# EAGLE board module_pcb v110 (EAGLE 9.7.0)
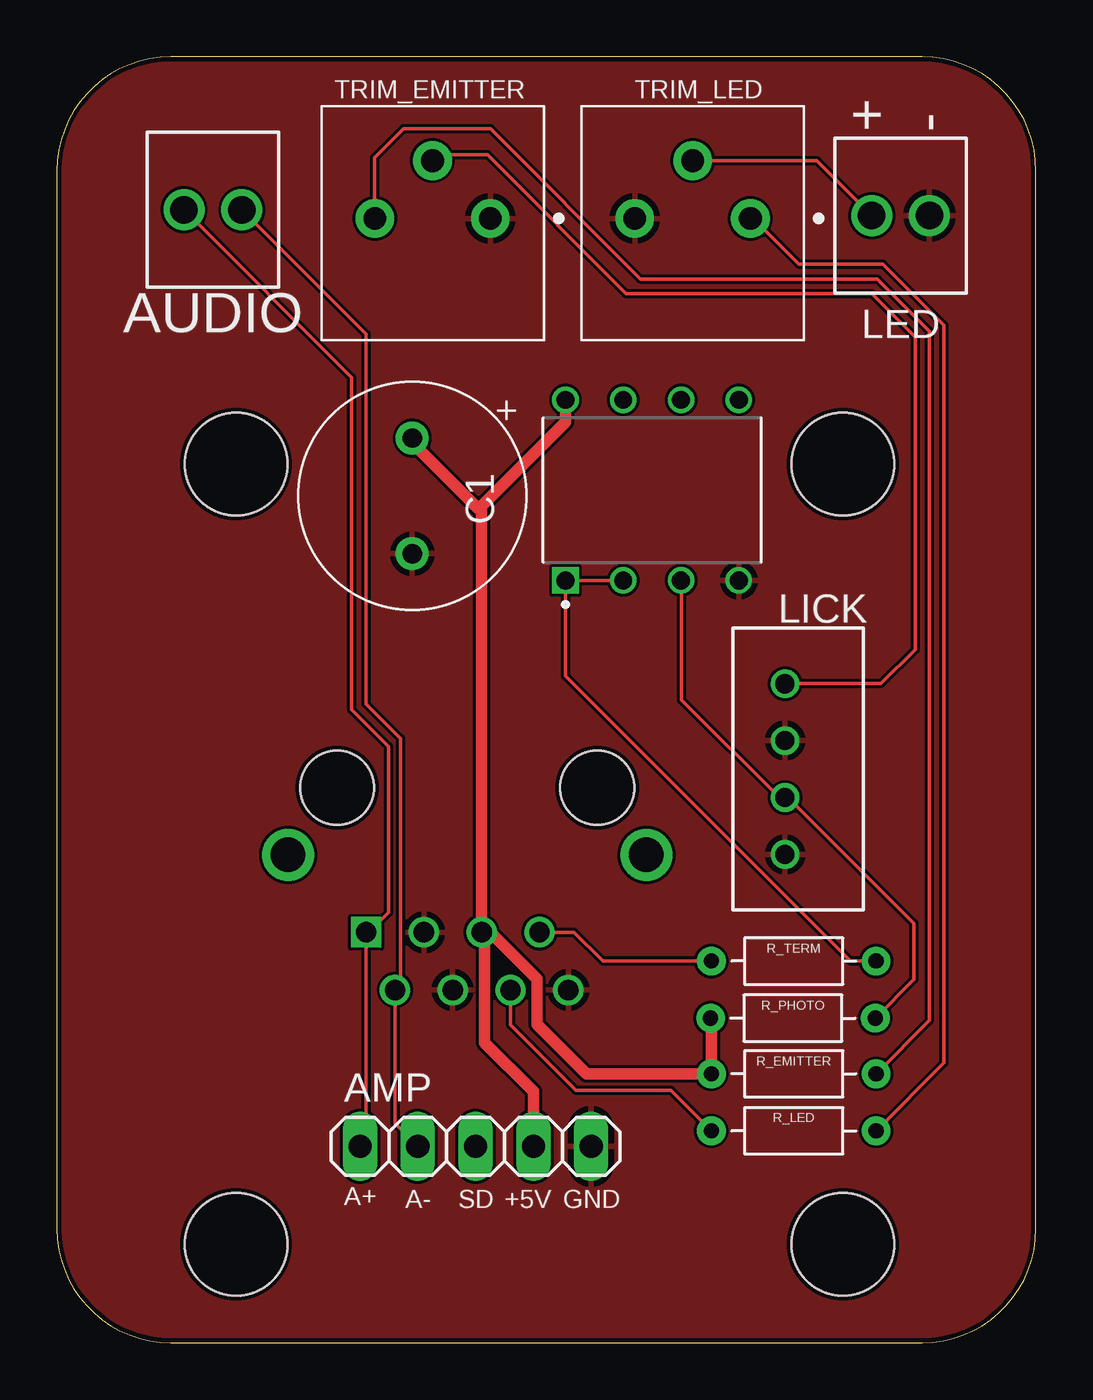
[diagram p0: board, top side]
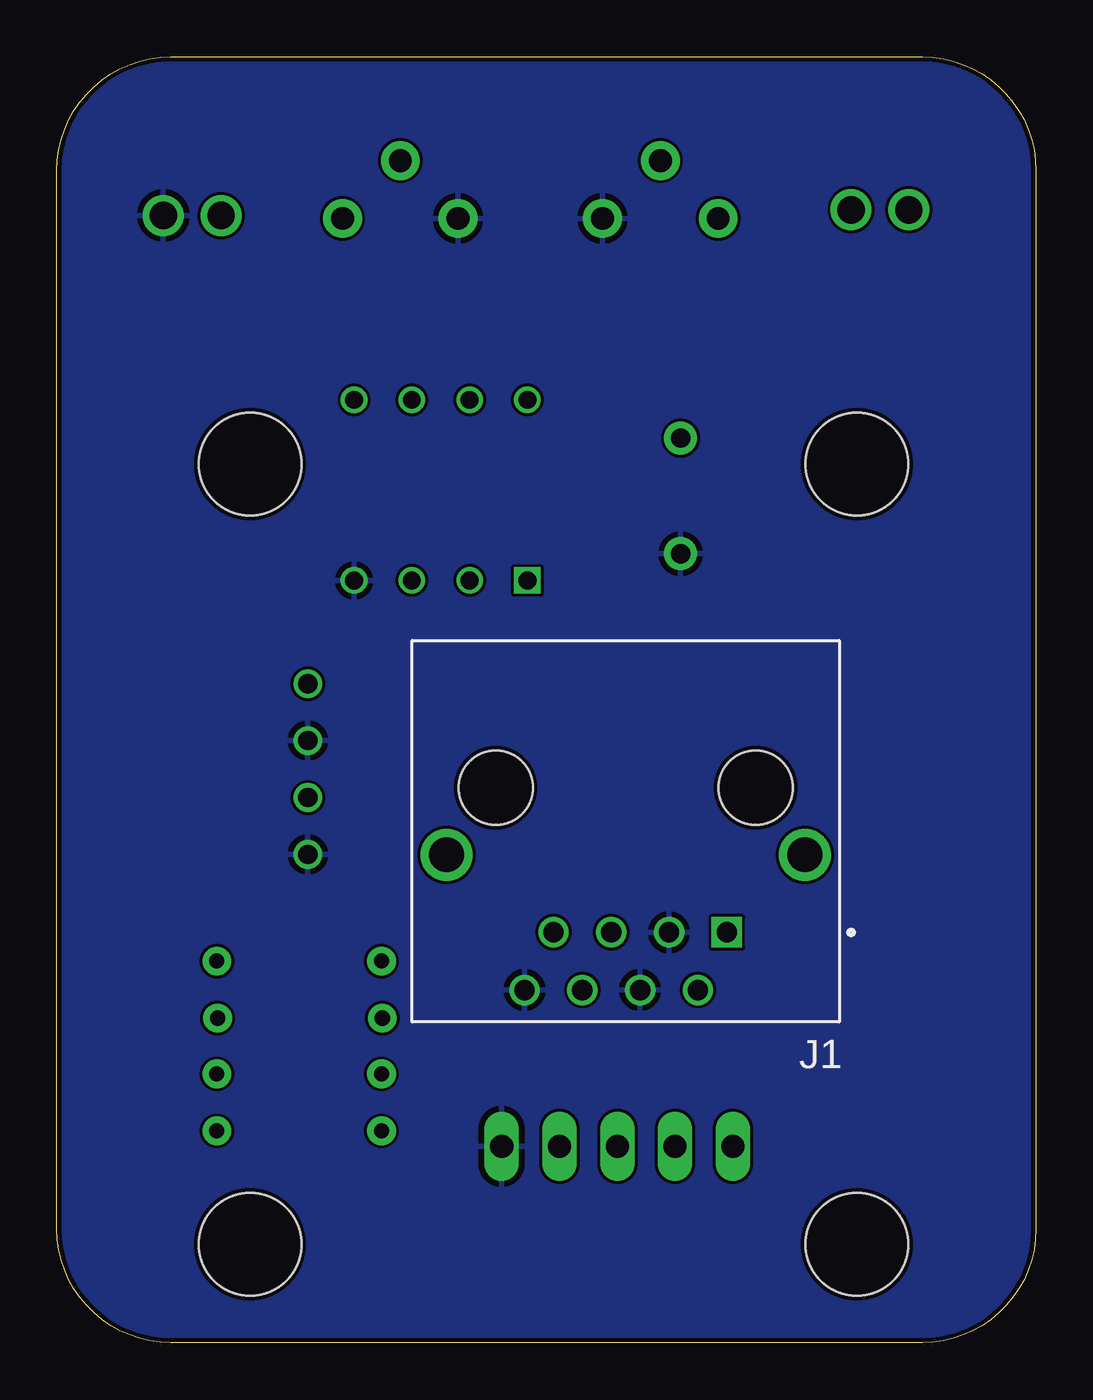
[diagram p1: board, bottom side, seen from below]

Size 43.03 x 56.5 mm. Coordinates in mm from the lower left corner, seen from the top.
Outline: 38.03,56.5 5,56.5 arc90 0,51.5 0,5 arc90 5,0 38.03,0 arc90 43.03,5 43.03,51.5 arc90 38.03,56.5
Copper layers (1*16): Top 0.035559375mm / dielectric 1.6mm / Bottom 0.035559375mm
Design rules "jlcpcb2layer": minimum track width 5mil, minimum drill 12mil, track to track 5mil, track to pad 5mil, pad to pad 5mil, via to via 5mil, smd to smd 5mil, copper to edge 8mil, drill to drill 6mil, minimum pad ring 5mil, minimum via ring 3mil, stop-mask expansion 2.5mil, vias tented up to drill 0mil, thermal gap 10mil
Holes 4.5 mm at 7.87,38.61 7.87,4.32 34.54,4.32 34.54,38.61

## Footprints (pad centres in the part's own frame; a part is rotated, then mirrored left to right if it is on the bottom)
1X05 = drill 1.016 long: 1 -5.08,0; 2 -2.54,0; 3 0,0; 4 2.54,0; 5 5.08,0
TERMBLK_254-2N = drill 1.2: 1 0,0; 2 2.54,0
CAPPRD508W65D1000H1100B = drill 0.85 pad 1.45: 1 -2.54,0; 2 2.54,0
TE_5557969-1 = drill 0.89 square: 1 -4.445,6.35 | drill 0.89: 2 -3.175,8.89; 3 -1.905,6.35; 4 -0.635,8.89; 5 0.635,6.35; 6 1.905,8.89; 7 3.175,6.35; 8 4.445,8.89 | drill 1.52: S1 -7.875,2.95; S2 7.875,2.95 | hole 3.25: -5.715,0; 5.715,0
B4B-XH-A = drill 0.84: 1 0,0; 2 2.5,0; 3 5,0; 4 7.5,0
RESAD724W46L381D178B = drill 0.66 pad 1.26: 1 -3.62,0; 2 3.62,0
PV36P = drill 1 pad 1.7: 1 0,0; 2 2.54,-2.54; 3 5.08,0
DIP794W45P254L959H508Q8 = drill 0.78 pad 1.13 square: 1 -3.97,3.81 | drill 0.78 pad 1.13: 2 -3.97,1.27; 3 -3.97,-1.27; 4 -3.97,-3.81; 5 3.97,-3.81; 6 3.97,-1.27; 7 3.97,1.27; 8 3.97,3.81

## Placement (x,y rotation side)
AMP  PINHD-1X5  [1X05]  18.4,8.62 180 top
AUDIO  2828XX-2282834-2  [TERMBLK_254-2N]  5.59,49.78 0 top
C1  0.1µF  [CAPPRD508W65D1000H1100B]  15.62,37.21 270 top
J1  5557969-1  [TE_5557969-1]  18.03,24.38 180 bottom
LED  2828XX-2282834-2  [TERMBLK_254-2N]  38.35,49.53 180 top
LICK  B4B-XH-A  [B4B-XH-A]  32,28.96 270 top
R_EMITTER  68Ω  [RESAD724W46L381D178B]  32.38,11.81 180 top
R_LED  220Ω  [RESAD724W46L381D178B]  32.38,9.31 0 top
R_PHOTO  22kΩ  [RESAD724W46L381D178B]  32.35,14.26 180 top
R_TERM  50Ω  [RESAD724W46L381D178B]  32.38,16.76 180 top
TRIM_EMITTER  5kΩ  [PV36P]  19.05,49.4 180 top
TRIM_LED  1kΩ  [PV36P]  30.48,49.4 180 top
U1  LM6132BIN  [DIP794W45P254L959H508Q8]  26.16,37.46 90 top

## Library data of the parts
AMP = Connector; CATEGORY: Headers; DESCRIPTION: Header, Straight, 5 Position; MANUFACTURER: Generic; MPN: Generic; OPERATING_TEMPERATURE: Generic; PART_STATUS: Active; PITCH: 0.100" (2.54mm); ROHS_COMPLIANCE: Generic; SERIES: Generic; SUB-CATEGORY: Headers, Male Pins; TYPE: Board to Board or Cable, Unshrouded, Through Hole, Straight
AUDIO LED = Connector; CATEGORY: Fixed Terminal Blocks; DESCRIPTION: Fixed Terminal Blocks 2P SIDE ENTRY 2.54mm; MANUFACTURER: TE Connectivity AMP Connectors; MPN: 282834-2; OPERATING_TEMPERATURE: -40°C ~ 105°C; PART_STATUS: Active; PITCH: 0.100" (2.54mm); ROHS_COMPLIANCE: RoHS Compliant; SERIES: Buchanan; SUBCATEGORY: Terminal Blocks; TYPE: Through Hole; Screw - Rising Cage Clamp; Side wire entry, Horizontal with Board
C1 = Capacitor; CATEGORY: Capacitor
J1 = 5557969-1; MANUFACTURER: TE Connectivity; PARTREV: E; STANDARD: Manufacturer Recommendation
LICK = Connector; CATEGORY: Header; DSECRIPTION: Connector Header Through Hole 4 position 0.098" (2.50mm); MANUFACTURER: JST Sales America Inc.; MPN: B4B-XH-A(LF)(SN); OPERATING_TEMPERATURE: -25 C to 85 C; PART_STATUS: ACTIVE; PITCH: 0.098" (2.50mm); ROHS_COMPLIANCE: ROHS3 Compliant; SERIES: XH; SUB_CATEGORY: Rectangular Connectors; TYPE: Header, Male Pin, Board to Cable/Wire, Through Hole
R_EMITTER R_LED R_PHOTO R_TERM = Resistor; CATEGORY: Resistor; SUB-CATEGORY: Fixed
TRIM_EMITTER TRIM_LED = Resistor; CATEGORY: Resistor; DESCRIPTION: Lead Sealed Type Multiturn PV36 Series; MANUFACTURER: BOURNS; MPN: PV36P; OPERATING_TEMPERATURE: -55 to +125 °C; PART_STATUS: Active; ROHS_COMPLIANCE: RoHS Compliant; SERIES: PV36; SUB-CATEGORY: Trimpot; TYPE: Lead Sealed
U1 = LM6132BIN

## Nets
+5V: AMP.2 C1.1 J1.5 R_EMITTER.2 R_PHOTO.2 U1.8
A+: AMP.5 AUDIO.1 J1.1
A-: AMP.4 AUDIO.2 J1.2
GND: AMP.1 C1.2 J1.3 J1.4 J1.8 LED.1 LICK.2 LICK.4 TRIM_EMITTER.1 TRIM_LED.3 U1.4
LED_ON: J1.6 R_LED.1
LICK: LICK.3 R_PHOTO.1 U1.3
LICK_BUFF: R_TERM.1 U1.1 U1.2
LICK_FINAL: J1.7 R_TERM.2
TRIM_EMITTER_IN: R_EMITTER.1 TRIM_EMITTER.3
TRIM_EMITTER_OUT: LICK.1 TRIM_EMITTER.2
TRIM_LED_IN: R_LED.2 TRIM_LED.1
TRIM_LED_OUT: LED.2 TRIM_LED.2

## Tracks (layer width: path | path; a pad name or v marks a point on that pad's centre or on a via)
+5V
  Top 0.508: J1.5 18.8,17.91 18.8,13.18 20.94,11.04 AMP.2 | 18.67,36.77 J1.5 | J1.5 19.05,18.03 21.1,15.98 21.1,13.99 23.28,11.81 R_EMITTER.2 28.77,14.22 R_PHOTO.2 | 18.67,36.77 18.54,36.64 15.62,39.56 C1.1 | U1.8 22.35,40.45 18.67,36.77
A+
  Top 0.152: AMP.5 13.59,8.89 J1.1 13.72,18.03 14.58,18.9 14.58,26.19 12.95,27.81 12.95,42.42 AUDIO.1
A-
  Top 0.152: AMP.4 14.86,9.63 J1.2 15.11,15.75 15.11,26.54 13.59,28.07 13.59,44.32 AUDIO.2
GND
  pour Bottom: 5,0.08 38.03,0.08 38.68,0.12 39.31,0.24 39.92,0.45 40.49,0.74 41.03,1.09 41.51,1.52 41.94,2 42.3,2.54 42.58,3.12 42.79,3.73 42.91,4.36 42.96,5 42.96,51.5 42.91,52.15 42.79,52.78 42.58,53.39 42.3,53.96 41.94,54.5 41.51,54.98 41.03,55.41 40.49,55.77 39.92,56.05 39.31,56.26 38.68,56.38 38.03,56.43 5,56.43 4.36,56.38 3.73,56.26 3.12,56.05 2.54,55.77 2,55.41 1.52,54.98 1.09,54.5 0.74,53.96 0.45,53.39 0.24,52.78 0.12,52.15 0.08,51.5 0.08,5 0.12,4.36 0.24,3.73 0.45,3.12 0.74,2.54 1.09,2 1.52,1.52 2,1.09 2.54,0.74 3.12,0.45 3.73,0.24 4.36,0.12
  pour Top: 5,0.08 38.03,0.08 38.68,0.12 39.31,0.24 39.92,0.45 40.49,0.74 41.03,1.09 41.51,1.52 41.94,2 42.3,2.54 42.58,3.12 42.79,3.73 42.91,4.36 42.96,5 42.96,51.5 42.91,52.15 42.79,52.78 42.58,53.39 42.3,53.96 41.94,54.5 41.51,54.98 41.03,55.41 40.49,55.77 39.92,56.05 39.31,56.26 38.68,56.38 38.03,56.43 5,56.43 4.36,56.38 3.73,56.26 3.12,56.05 2.54,55.77 2,55.41 1.52,54.98 1.09,54.5 0.74,53.96 0.45,53.39 0.24,52.78 0.12,52.15 0.08,51.5 0.08,5 0.12,4.36 0.24,3.73 0.45,3.12 0.74,2.54 1.09,2 1.52,1.52 2,1.09 2.54,0.74 3.12,0.45 3.73,0.24 4.36,0.12
LED_ON
  Top 0.152: J1.6 19.94,13.97 22.83,11.08 26.99,11.08 R_LED.1
LICK
  Top 0.152: R_PHOTO.1 37.67,15.96 37.67,18.42 32.13,23.96 LICK.3 31.75,23.96 27.46,28.25 27.46,33.47 U1.3
LICK_BUFF
  Top 0.152: R_TERM.1 34.88,16.76 22.35,29.3 U1.1 U1.2
LICK_FINAL
  Top 0.152: R_TERM.2 24,16.76 22.73,18.03 J1.7
TRIM_EMITTER_IN
  Top 0.152: R_EMITTER.1 38.35,14.16 38.35,44.45 36.07,46.74 25.65,46.74 19.05,53.34 15.24,53.34 13.97,52.07 TRIM_EMITTER.3
TRIM_EMITTER_OUT
  Top 0.152: TRIM_EMITTER.2 16.76,52.2 18.92,52.2 25.02,46.1 35.81,46.1 37.72,44.2 37.72,30.46 36.22,28.96 LICK.1
TRIM_LED_IN
  Top 0.152: R_LED.2 38.99,12.29 38.99,44.72 36.31,47.4 32.61,47.4 30.61,49.4 TRIM_LED.1
TRIM_LED_OUT
  Top 0.152: TRIM_LED.2 33.4,51.94 LED.2

## Text on the board
tNames: + | - | A+ | A- | SD | +5V | GND